# Altium PCB TEMPLATE_PCB_2L.PcbDoc
Units mm, origin at the board's own origin, x right, y up, seen from the top; angles counter-clockwise.
Board outline 60 x 60 mm, 2 copper layers (Top, Bottom), stack 1.54 mm thick; 23 components, 14 nets, 93 pads, 19 vias.
Unrouted connection lines stored in the file: 39.
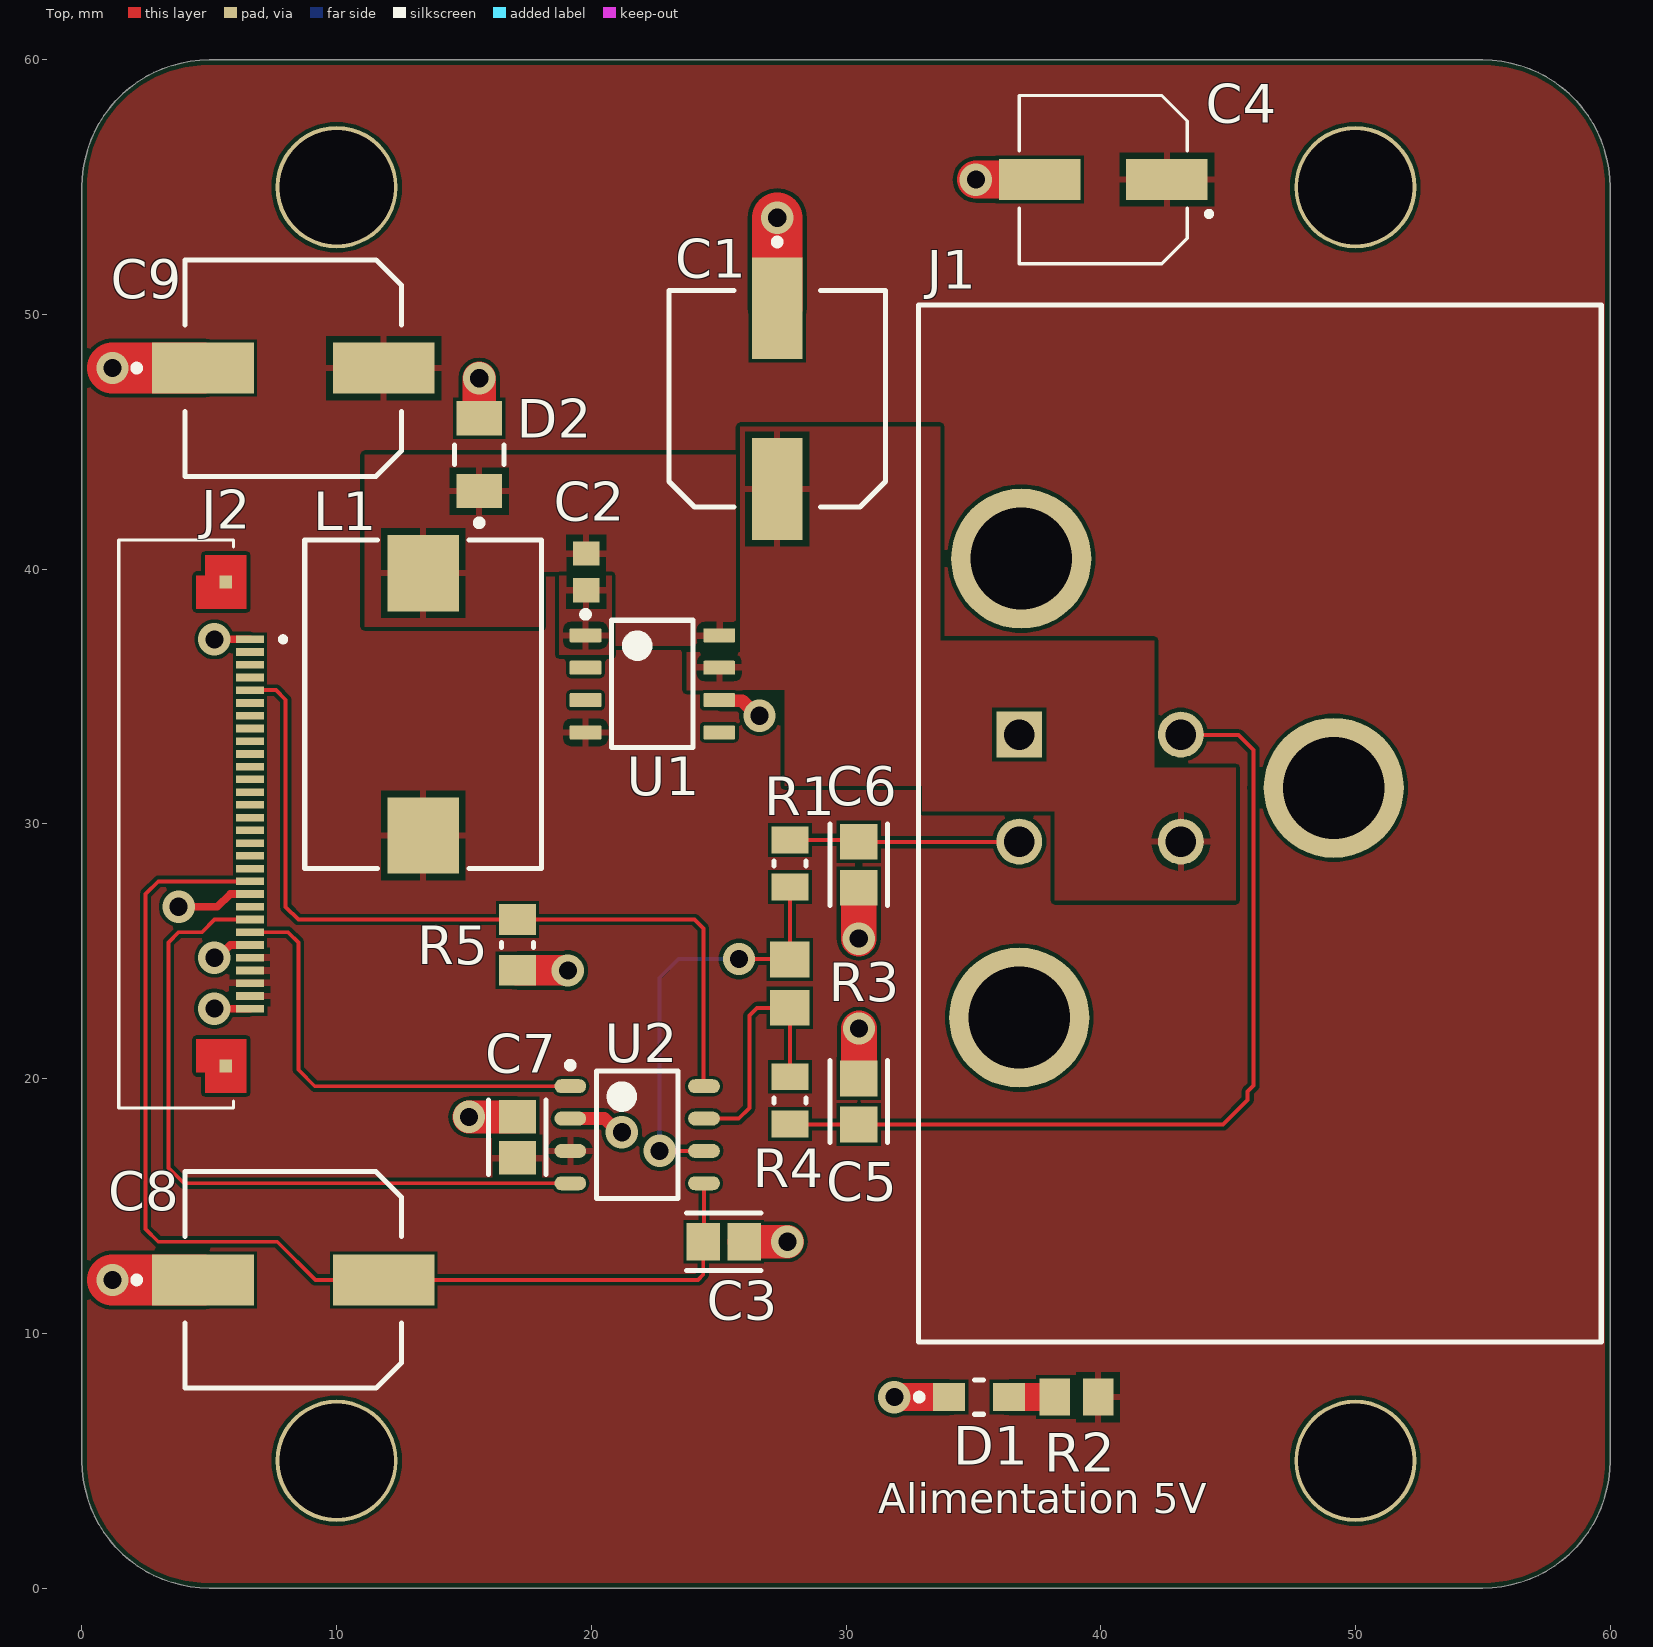
[diagram p0: Top view]
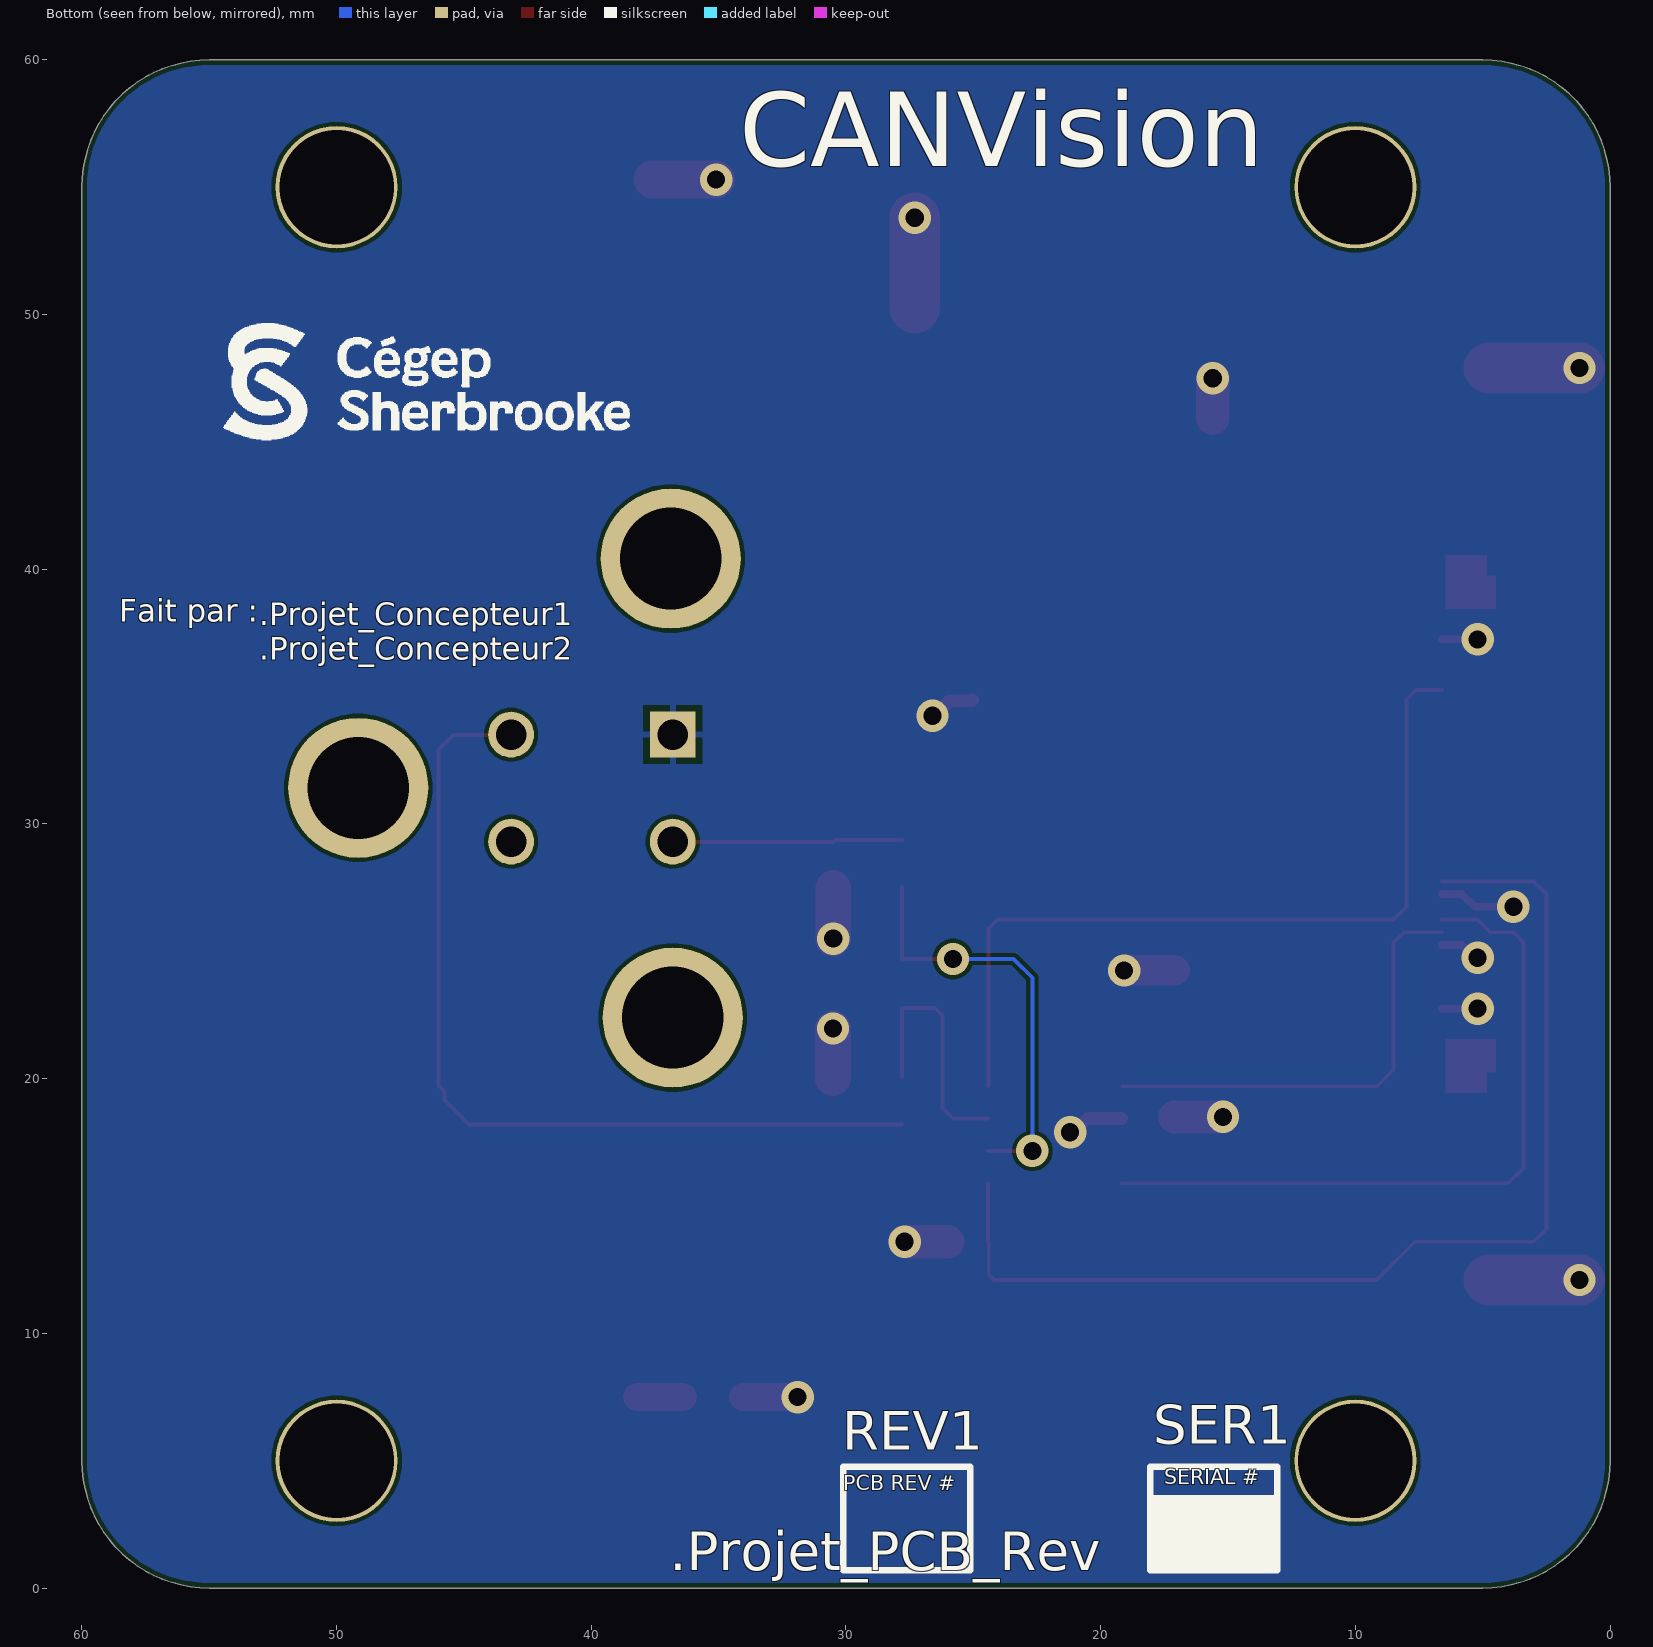
[diagram p1: Bottom view, seen from below]
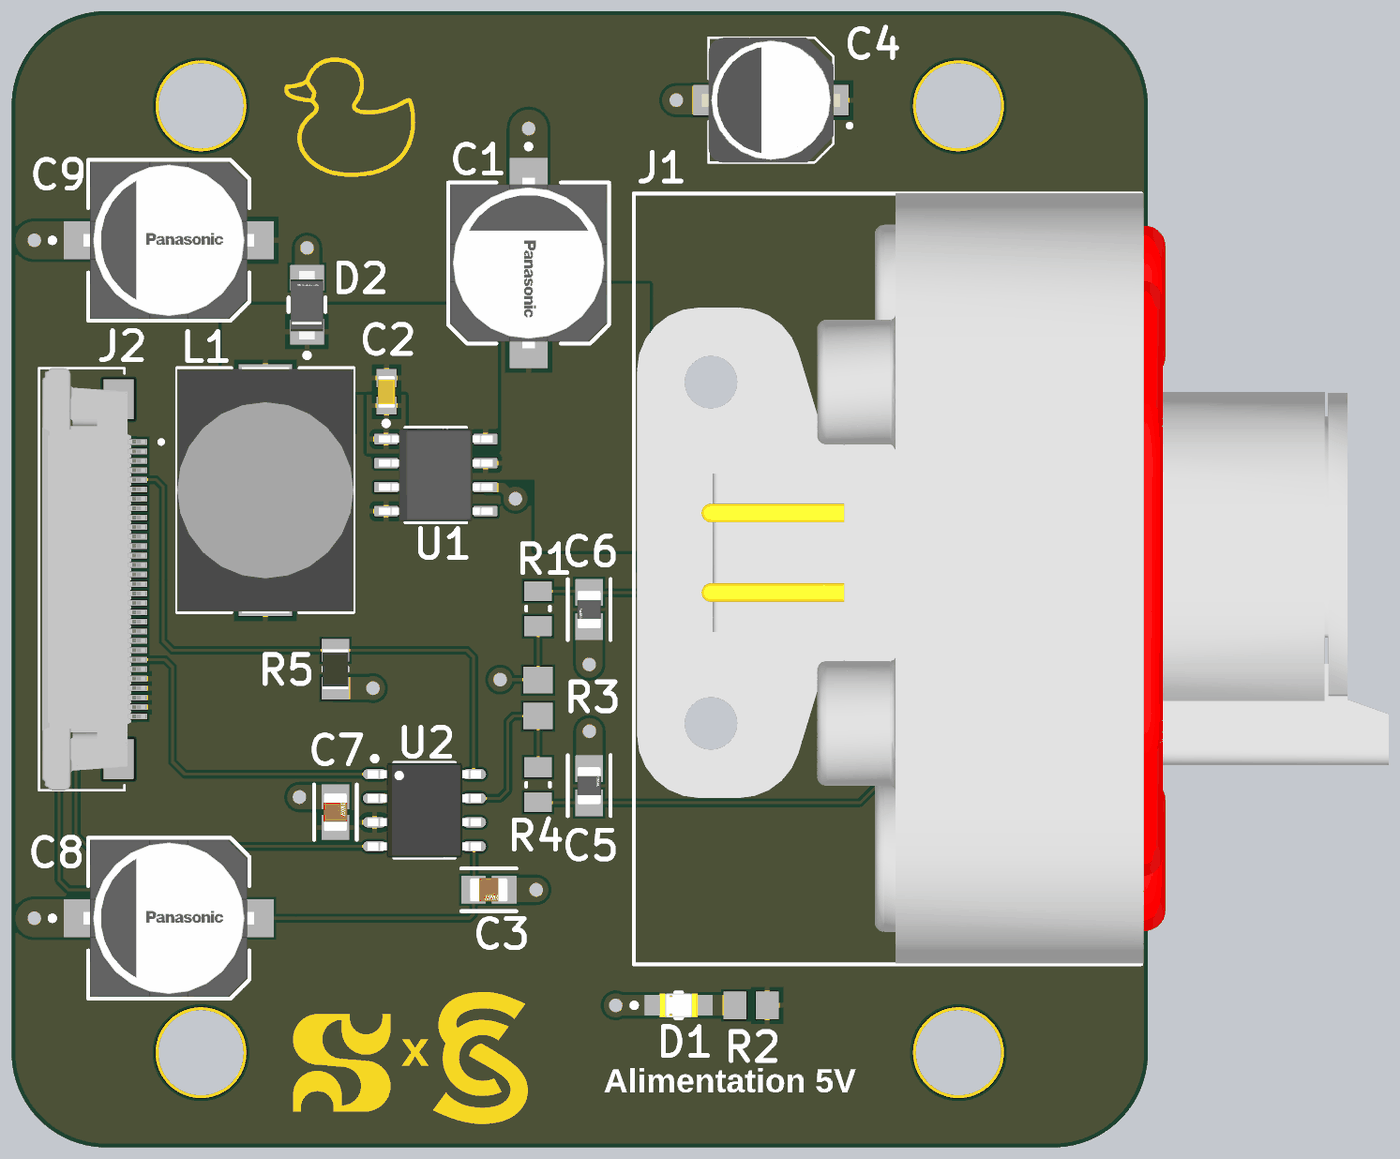
[diagram p2: 3D render of the assembled board from above, using the file's embedded part models]

## Layer stack, top to bottom
Top Solder: solder mask 0.0102, Solder Resist, Dk 3.5
Top: signal copper 0.035
Dielectric 1: core 1.47, FR-4, Dk 4.6
Bottom: signal copper 0.035
Bottom Solder: solder mask 0.0102, Solder Resist, Dk 3.5

## Board outline
0,5 0,55 cw(c5,55) 5,60 55,60 cw(c55,55) 60,55 60,5 cw(c55,5) 55,0 5,0 cw(c5,5)

## Design rules (kind name [scope] priority, off if disabled: settings)
BoardOutlineClearance [All] p1: gap=0.2 ignorepadtopadclearanceinfootprint=FALSE
Clearance [All] p1: gap=0.152 ignorepadtopadclearanceinfootprint=FALSE except(0: Text-Hole; 0.127: Arc-Arc Arc-Track Track-Track SMDPad-Fill SMDPad-Poly SMDPad-Region; 0.2: Arc-SMDPad Arc-Hole Track-SMDPad Track-Hole SMDPad-Hole THPad-Hole Via-Hole Fill-Hole Poly-Hole Region-Hole; 0.254: Arc-Via Track-Via Via-Via; 0.33: Arc-THPad Track-THPad; 0.5: THPad-THPad)
ComponentClearance [All] p1: gap=0.102 collisioncheckmode=3 verticalgap=0.102 showdistances=FALSE
Height [All] p1: minheight=0 maxheight=40 prefheight=12.7
HoleSize [All] p1: absolutevalues=TRUE maxlimit=6.3 minlimit=0.3 maxpercent=80.000 minpercent=20.000
HoleToHoleClearance [All] p1: gap=0.5 allowstackedmicrovias=FALSE
MinimumAnnularRing [All] p1: minimumring=0.13
MinimumSolderMaskSliver [All] p1: minsoldermaskwidth=0.08
PlaneClearance [All] p1: clearance=0.152
PlaneConnect [All] p1: pad.planeconnectstyle=Relief pad.reliefexpansion=0.508 pad.reliefentries=4 pad.reliefconductorwidth=0.254 pad.reliefairgap=0.254 via.planeconnectstyle=Direct via.reliefexpansion=0.508 via.reliefentries=4 via.reliefconductorwidth=0.254 via.reliefairgap=0.254
PolygonConnect [All] p1: thpad.connectstyle=Relief thpad.reliefconductorwidth=0.254 thpad.reliefentries=4 thpad.polygonreliefangle="90 Angle" thpad.airgapwidth=0.254 smdpad.connectstyle=Relief smdpad.reliefconductorwidth=0.254 smdpad.reliefentries=4 smdpad.polygonreliefangle="90 Angle" smdpad.airgapwidth=0.254 via.connectstyle=Direct via.reliefconductorwidth=0.254 via.reliefentries=4 via.polygonreliefangle="90 Angle" via.airgapwidth=0.254
RoutingVias [All] p1: holewidth=0.3 width=0.5 viastyle="Through Hole" minholewidth=0.3 minwidth=0.5 maxholewidth=6.3 maxwidth=6.5
SilkToSilkClearance [All] p1: silktosilkclearance=0.102
SilkToSolderMaskClearance [IsPad] p1: minsilkscreentomaskgap=0.024 clearancetoexposedcopper=FALSE
SolderMaskExpansion SolderMaskExpansion_Via [isVia] p1: expansion=0.102 istentingtop=TRUE
SolderMaskExpansion [All] p2: expansion=0.051 istentingtop=FALSE
Width [All] p1: maxlimit=25.4 minlimit=0.127 preferedwidth=0.152 minimp=50.000000 maximp=50.000000 favimp=50.000000
21 further rules are at their usual default settings.

## Classes and differential pairs
component class TEMPLATE_Title: REV1 SER1

## Components (designator, comment, footprint, x,y, rotation, side; value= is the part's Value field where it differs from the comment)
C1 "100 uF" FP-FKF-MFG 27.3,46.7 r270 top
C2 "10 nF" CAPC1608X90X35ML10T15 19.8,39.9 r90 top
C3 "0.1uF" FP-0805-L_2_01_0_2-W_1_25-IPC_B 25.2,13.6 r0 top
C4 "68 uF" CAP_EEEFN1H680XP 40.1,55.3 r180 top
C5 "100 pF" FP-CC0805-0_1-0_7-IPC_A 30.5,19.102 r90 top
C6 "100 pF" FP-CC0805-0_1-0_7-IPC_A 30.5,28.4 r270 top
C7 "0.1uF" FP-0805-L_2_01_0_2-W_1_25-IPC_B 17.1,17.7 r90 top
C8 "100 uF" FP-FKF-MFG 8.3,12.1 r0 top
C9 "100 uF" FP-FKF-MFG 8.3,47.9 r0 top
D1 "10mA FC / 2.2VF" FP-SML-210-MFG 35.225,7.5 r0 top
D2 "SS14FL" FP-425AD-MFG 15.6,44.5 r90 top value=60pF
J1 "ATM13-4P-BM02" ATM134PBM02 36.8,33.51 r270 top
J2 "F32Q-1A7H1-11030" AMPHENOL_F32Q-1A7H1-11030 3.7,30 r270 top
L1 "47uF" NPI31W470MTRF 13.4,34.7 r270 top
R1 "10" RESC2013X50X30NL20T20 27.8,28.45 r270 top
R2 "270" RESC2013X60X40NL20T25 39.05,7.5 r0 top
R3 "120" RESC2013X60X40ML20T25 27.8,23.73 r90 top
R4 "10" RESC2013X50X30NL20T20 27.8,19.15 r90 top
R5 "1K" RESC2013X60X35ML10T20 17.1,25.25 r90 top
REV1 "Revision Cartridge Mini" REV_REVISION_CARTRIDGE_MINI 30.116,0.699 r180 bottom
SER1 "Serial Cartridge MICRO" SER_SERIAL_CARTRIDGE_MICRO 18.06,0.699 r180 bottom
U1 "LM2675M-5.0/NOPB" D0008A_L 22.4,35.5 r0 top
U2 "TJA1051T/3,118" NXP-SOIC-8_L 21.8,17.8 r0 top

## Footprints (in the part's own frame and the unit in brackets; to place one, negate y for a bottom-side part, rotate by r counter-clockwise, add the part's x,y. Pads: shape width x height; smd on the part's side, far side on the other; paste and mask are expansions set on the pad)
AMPHENOL_F32Q-1A7H1-11030 [mm]
  rect 0.3x1.1 smd mask+0.05: 1(-7.25,2.9) 2(-6.75,2.9) 3(-6.25,2.9) 4(-5.75,2.9) 5(-5.25,2.9) 6(-4.75,2.9) 7(-4.25,2.9) 8(-3.75,2.9) 9(-3.25,2.9) 10(-2.75,2.9) 11(-2.25,2.9) 12(-1.75,2.9) 13(-1.25,2.9) 14(-0.75,2.9) 15(-0.25,2.9) 16(0.25,2.9) 17(0.75,2.9) 18(1.25,2.9) 19(1.75,2.9) 20(2.25,2.9) 21(2.75,2.9) 22(3.25,2.9) 23(3.75,2.9) 24(4.25,2.9) 25(4.75,2.9) 26(5.25,2.9) 27(5.75,2.9) 28(6.25,2.9) 29(6.75,2.9) 30(7.25,2.9)
  rect 0.5x0.5 smd paste-1 mask+0: S1(-9.5,1.95) S2(9.5,1.95)
  Top region: -8.45,0.8 -9.75,0.8 -9.75,1.15 -10.55,1.15 -10.55,2.75 -8.45,2.75
  Top region: 10.55,1.15 9.75,1.15 9.75,0.8 8.45,0.8 8.45,2.75 10.55,2.75
  silkscreen extent -11.15,-2.25 11.15,4.3, body extent -11.16,-2.09 11.14,3.41, height 2.03
ATM134PBM02 [mm]
  rect 1.8x1.8 hole 1.2: 1(0,0)
  round 1.8 hole 1.2: 2(4.2,0) 3(0,6.35) 4(4.2,6.35)
  round 5.5 hole 4: MH1(-6.91,0.08) MH2(11.11,0) MH3(2.09,12.35)
  silkscreen extent -16.86,-3.95 23.84,22.85, body extent -16.87,-3.77 23.79,35.93, height 34.33
CAP_EEEFN1H680XP [mm]
  rect 3.2x1.6 smd: 1(-2.5,0) 2(2.5,0)
  silkscreen extent -4.25,-3.3 3.3,3.3, body extent -3.65,-3.3 3.65,3.3, height 7.7
CAPC1608X90X35ML10T15 [mm] "Chip Capacitor, 2-Leads, Body 1.7x0.9mm, IPC Low Density"
  rect 0.95x1.05 smd: 1(-0.725,0) 2(0.725,0)
  body extent -0.85,-0.45 0.85,0.45, height 0.9
D0008A_L [mm] "SOIC, 8-Leads, Body 5x4mm, Pitch 1.27mm, IPC High Density"
  rrect18% 1.25x0.55 smd: 1(-2.625,1.905) 2(-2.625,0.635) 3(-2.625,-0.635) 4(-2.625,-1.905) 5(2.625,-1.905) 6(2.625,-0.635) 7(2.625,0.635) 8(2.625,1.905)
  silkscreen extent -2.75,-2.5 1.6,2.85, body extent -3,-2.45 3,2.45, height 1.63
FP-425AD-MFG [mm]
  rect 1.34x1.8 smd paste+0 mask+0: 1(-1.43,0) 2(1.43,0)
  silkscreen extent -2.8,-0.97 0.39,0.97, body extent -2.2,-1.07 2.2,1.07, height 0.25
FP-0805-L_2_01_0_2-W_1_25-IPC_B [mm]
  rect 1.305x1.456 smd paste+0 mask+0: 1(-0.806,0) 2(0.806,0)
  silkscreen extent -1.46,-1.13 1.46,1.13, body extent -1.71,-0.98 1.71,0.98, height 0.25
FP-CC0805-0_1-0_7-IPC_A [mm]
  rect 1.408x1.462 smd paste+0 mask+0: 1(-0.902,0) 2(0.902,0)
  silkscreen extent -1.61,-1.13 1.61,1.13, body extent -2.11,-1.23 2.11,1.23, height 0.25
FP-FKF-MFG [mm]
  rect 4x2 smd paste+0 mask+0: 1(-3.55,0) 2(3.55,0)
  silkscreen extent -6.27,-4.25 4.25,4.25, body extent -5.8,-4.5 5.8,4.5, height 0.25
FP-SML-210-MFG [mm]
  rect 1.25x1.1 smd paste+0 mask+0: 1(-1.175,0) 2(1.175,0)
  silkscreen extent -2.47,-0.67 0.18,0.67, body extent -1.9,-0.77 1.9,0.77, height 0.25
NPI31W470MTRF [mm] "Precision Wire Wound Inductor, 2-Leads, Body 12.80x9.30mm, IPC Medium Density"
  rect 3x2.8 smd: 1(-5.15,0) 2(5.15,0)
  silkscreen extent -6.45,-4.65 6.45,4.65, body extent -6.5,-4.65 6.5,4.65, height 5.1
NXP-SOIC-8_L [mm] "SOIC, 8-Leads, Body 5x4mm, Pitch 1.27mm, IPC High Density"
  oval 1.25x0.55 smd: 1(-2.625,1.905) 2(-2.625,0.635) 3(-2.625,-0.635) 4(-2.625,-1.905) 5(2.625,-1.905) 6(2.625,-0.635) 7(2.625,0.635) 8(2.625,1.905)
  silkscreen extent -2.75,-2.5 1.6,2.85, body extent -3,-2.5 3,2.5, height 1.75
RESC2013X50X30NL20T20 [mm] "Chip Resistor, 2-Leads, Body 2.00x1.25mm, IPC Medium Density"
  rect 1.05x1.45 smd: 1(-0.925,0) 2(0.925,0)
  silkscreen extent -0.1,-0.63 0.1,0.63, body extent -1.1,-0.72 1.1,0.72, height 0.5
RESC2013X60X35ML10T20 [mm] "Chip Resistor, 2-Leads, Body 2.1x1.35mm, IPC Low Density"
  rect 1.2x1.45 smd: 1(-1,0) 2(1,0)
  silkscreen extent -0.1,-0.63 0.1,0.63, body extent -1.05,-0.68 1.05,0.67, height 0.6
RESC2013X60X40ML20T25 [mm] "Chip Resistor, 2-Leads, Body 2.00x1.25mm, IPC Low Density"
  rect 1.4x1.55 smd: 1(-0.95,0) 2(0.95,0)
  body extent -1.1,-0.72 1.1,0.72, height 0.6
RESC2013X60X40NL20T25 [mm] "Chip Resistor, 2-Leads, Body 2.00x1.25mm, IPC Medium Density"
  rect 1.2x1.45 smd: 1(-0.85,0) 2(0.85,0)
  body extent -1.1,-0.72 1.1,0.72, height 0.6
REV_REVISION_CARTRIDGE_MINI [mm]
  silkscreen extent 0,0 5,4.08
SER_SERIAL_CARTRIDGE_MICRO [mm]
  silkscreen extent 0,0 5.02,4.08

## Part data
C1 C8 C9: library part CMP-2000-06208-3, "CAP ALUM 100UF 20% 50V SMD", Capacitance=100uF, Case/Package=Radial, Dielectric Material=Aluminium, ESR (Equivalent Series Resistance)=340mR, Leakage Current=3uA, Max Operating Temperature=105°C, Min Operating Temperature=-55°C, Package Quantity=1, Ripple Current=350mA, Tolerance=20%, Voltage=50V, Construction=Cylindrical, Contact Plating=Tin, Diameter=8mm, Height=10.2mm, Height - Seated (Max)=0.402inch, Impedance=340mR, Lead Free="Lead Free", Length=10.2mm, Life (Hours)=2000Hour, Material=Aluminium, Mount="Surface Mount", Number of Pins=2, Packaging="Tape and Reel", Radiation Hardening=No, REACH SVHC="No SVHC", Ripple Current (AC)=350mA, RoHS Compliant=Yes, Series=FK, Termination=SMD/SMT, Voltage Rating=50V, Voltage Rating (DC)=50V, Width=10mm
C2: library part CMP-2100-03642-1, "Chip Capacitor, 10 nF, +/- 10%, 50 V, -55 to 125 degC, 0603 (1608 Metric), RoHS, Tape and Reel", Capacitance=10nF, Case Code (Imperial)=0603, Case Code (Metric)=1608, Dielectric=X7R, Dielectric Material=Ceramic, Insulation Resistance=10GR, Manufacturer=Murata, Max Operating Temperature=125degC, Min Operating Temperature=-55degC, Package Description="2-Pin Surface Mount Device, Body 1.6 x 0.8 mm", Package Quantity=1, Tolerance=10%, Voltage=50V, Case/Package=0603, Datasheet URL=http://search.murata.co.jp/Ceramy/image/img/A01X/G101/ENG/GRM188R71H103KA01-01.pdf, Datasheet Version=42401.0, Depth=0.8mm, Height=0.8mm, Lead Free=LeadFree, Length=1.6mm, Manufacturer URL=http://www.murata.com/, Material=Ceramic, Mount=SurfaceMount, Number of Pins=2, Package Reference=0603, Packaging=TapeandReel, REACH SVHC=Unknown, RoHSCompliant=True, Termination=SMD/SMT, Thickness=0.035inch, Voltage Rating=50V, Voltage Rating (DC)=50V, Width=0.031inch
C3 C7: library part CMP-2007-04172-2, "Automotive Ceramic Capacitor, 0805, 100nF, 10%, X7R, 15%, 100V", Capacitance=100nF, Case Code (Imperial)=0805, Case Code (Metric)=2012, Dielectric=X7R, Dielectric Material=Ceramic, Max Operating Temperature=125°C, Min Operating Temperature=-55°C, Package Quantity=1, Ratings=AEC-Q200, Tolerance=10%, Voltage=100V, Case/Package=0805, Construction=Flat, Depth=1.25mm, Height=1.4mm, Lead Free="Lead Free", Length=2.01mm, Mount="Surface Mount", Number of Pins=2, Packaging="Tape and Reel", Radiation Hardening=No, REACH SVHC="No SVHC", RoHS Compliant=Yes, Series=-, Termination=SMD/SMT, Thickness=0.055inch, Voltage Rating=100V, Voltage Rating (DC)=100V, Width=0.049inch
C4: library part EEEFN1H680XP, Package=None, Availability=Unavailable, MF="{'manufacturer': u'Panasonic Electronic Components'}", MP=EEEFN1H680XP, Price=None
C5 C6: library part CMP-03422-001508-1, "CAP CER 100PF 50V C0G/NPO 0805", Capacitance=100pF, Case Code (Imperial)=0805, Case Code (Metric)=2012, Dielectric=C0G, Dielectric Material=Ceramic, Insulation Resistance=100GR, Max Operating Temperature=125°C, Min Operating Temperature=-55°C, Package Quantity=1, Temperature Coefficient=30ppm/°C, Tolerance=5%, Voltage=50V, Case/Package=0805, Depth=1.25mm, Height=0.6mm, Lead Free="Lead Free", Length=2mm, Mount="Surface Mount", Number of Pins=2, Packaging="Tape and Reel", Radiation Hardening=No, REACH SVHC="No SVHC", Resistor Type=Ceramic, RoHS Compliant=Yes, Series=CC, Termination=SMD/SMT, Thickness=0.024inch, Voltage Rating=50V, Voltage Rating (DC)=50V, Width=1.25mm
D1: library part CMP-08952-000013-1, "LED GREEN CLEAR 0805 SMD", Colour=Green, Forward Current=20mA, Forward Voltage=2.2V, Manufacturer=ROHM, Manufacturer Part Number=SML-210MTT86, Package=SML-210, Power Dissipation=70mW, Reverse Voltage=4V, Temperature="-30°C to +85°C", Temperature Range High=+85°C, Temperature Range Low=-30°C, Automotive=No, Category=Diode, ComponentLink2Description=Datasheet, ComponentLink2URL=https://www.mouser.in/ds/2/348/sml-21-313092.pdf, Device Class L1=Optoelectronics, Device Class L2=LEDs, Device Class L3=unset, Digikey Description="LED GREEN CLEAR 0805 SMD", Height=0.90mm, Ipc Land Pattern Name=DIOCP200125X25, Lead Free=Yes, Led Orientation="Top View", Luminous Intensity=16mcd, Mouser Description="Standard LEDs - SMD GREEN SMD TRANS LENS", Octopart=https://octopart.com/sml-210mtt86-rohm-550711, Peak Emmision Wavelength=573nm, RoHS=TRUE, Wavelength=570nm
D2: library part CMP-07162-000013-1, "DIODE SCHOTTKY 40V 1A SOD123F", Capacitance=60pF, Forward Current=1A, Manufacturer="ON Semiconductor", Max Junction Temp=+125°C, Max Repetitive Reverse Voltage=40V, Max Surge Forward Current=40A, Package=425AD, Peak Reverse Current=30uA, Temperature="-55°C to +125°C", Temperature Range Low=-55°C, Automotive=No, Category=Diode, ComponentLink2Description=Datasheet, ComponentLink2URL=https://www.onsemi.com/pub/Collateral/SS14FL-D.PDF, Device Class L1="Discrete Semiconductors", Device Class L2=Diodes, Device Class L3="Schottky Diodes", Digikey Description="DIODE SCHOTTKY 40V 1A SOD123F", Height=1.08mm, Lead Free=Yes, Manufacturer Part Number=SS14FL, Mouser Description="SS14FL Series 40 V 1 A Surface Mount Schottky Barrier Rectifier - SOD-123F", Octopart=https://octopart.com/ss14fl-on+semiconductor-84331601, Reverse Voltage=40V, RoHS=TRUE, Temperature Range High=+125°C
J2: "Flex Connector, 0.50mm Pitch, Height 2.00mm, Right angle, Slider type, ZIF, Upper contact, 30 position , Without MYLAR", Package=None, Availability="In Stock", Check_prices=https://www.snapeda.com/parts/F32Q-1A7H1-11030/Amphenol/view-part/?ref=eda, MF="Amphenol ICC / Aorora", MP=F32Q-1A7H1-11030, Price=None, Purchase-URL=https://pricing.snapeda.com/search/part/F32Q-1A7H1-11030/?ref=eda, SnapEDA_Link=https://www.snapeda.com/parts/F32Q-1A7H1-11030/Amphenol/view-part/?ref=snap
L1: library part TEMPLATE_Circuit
R1 R4: library part CMP-2001-04915-1, Manufacturer="Vishay Dale", Part Number=CRCW080510R0FKEA
R2: library part CMP-2001-00596-1, Manufacturer=Panasonic, Part Number=ERA6AEB151V
R3: library part CMP-2001-00588-1, Manufacturer=Panasonic, Part Number=ERA6AEB121V
R5: library part CMP-2100-03671-1, "Chip Resistor, 1 KOhm, +/- 1%, 125 mW, -55 to 155 degC, 0805 (2012 Metric), RoHS, Tape and Reel", Case Code (Imperial)=0805, Case Code (Metric)=2012, Manufacturer=Yageo, Max Operating Temperature=155degC, Max Power Dissipation=125mW, Min Operating Temperature=-55degC, Package Description="2-Pin Surface Mounted Device, Body 2 x 1.25 mm", Package Quantity=1, Resistance=1KOhm, Temperature Coefficient=100ppm/degreesC, Tolerance=1%, Voltage Rating=150V, Case/Package=0805, Composition=ThickFilm, Datasheet URL=http://www.yageo.com/NewPortal/yageodocoutput?fileName=/pdf/R-Chip/PYu-RC_Group_51_RoHS_L_5.pdf, Datasheet Version="Rev. 5, 10/2016", Depth=1.25mm, Height=0.024inch, Lead Free=LeadFree, Length=0.079inch, Manufacturer URL=http://www.yageo.com/, Military Standard=Not, Number of Pins=2, Number of Terminations=2, Package Reference=0805, Packaging=TapeandReel, Power Rating=125mW, REACH SVHC=Unknown, RoHSCompliant=true, Termination=SMD/SMT, Voltage Rating (DC)=150V, Width=0.049inch
REV1: library part CMP-008-000037-1, "REV - REVISION CARTRIDGE MINI", Assembly Type=NONE, COLLISIONCHECKMODE=3, Component Type="Standard (No BOM)", Design Item ID=REV_REVISION_CARTRIDGE_MINI, GAP=0mil, LAYERKIND=SameLayer, NETSCOPE=AnyNet, Pin Count=0, Rule=UNIONINDEX=0, RULEKIND=ComponentClearance, SHOWDISTANCES=FALSE, Source=CEGEP_SHERBROOKE_TGE_LIBRARY.SchLib, UNIT=Imperial, VERTICALGAP=0mil
SER1: library part CMP-008-000042-1, "SER - SERIAL CARTRIDGE MICRO", Assembly Type=NONE, COLLISIONCHECKMODE=3, Component Type="Standard (No BOM)", Design Item ID=SER_SERIAL_CARTRIDGE_MICRO, GAP=0mil, LAYERKIND=SameLayer, NETSCOPE=AnyNet, Pin Count=0, Rule=UNIONINDEX=0, RULEKIND=ComponentClearance, SHOWDISTANCES=FALSE, Source=CEGEP_SHERBROOKE_TGE_LIBRARY.SchLib, UNIT=Imperial, VERTICALGAP=0mil
U1: library part CMP-0069-00699-3, "SIMPLE SWITCHER® Power Converter High Efficiency 1A Step-Down Voltage Regulator, 8-pin Narrow SOIC, Pb-Free", Manufacturer="Texas Instruments", PackageTopMarking=NSZXTT*2675*M5.0, PowerWise=N, Code_IPC=SOIC127P600-8, Code_JEDEC=MS-012-AA, ComponentLink1Description="Datasheet URL", ComponentLink1URL=http://www.ti.com/general/docs/lit/getliterature.tsp?genericPartNumber=LM2675&fileType=pdf, CompType=Switcher, PackageDescription="SOIC Narrow, 4.9 x 3.9 x 1.45mm, 8 Lead, 1.27mm Pitch", PackageReference=D0008A, PinCount=8, RoHS=Y
U2: library part CMP-2000-07245-1, "High-Speed CAN Transceiver, 3 to 5 V, 8-Pin SOIC (SOT96-1), RoHS, Tape and Reel", Manufacturer=NXP, Operating Supply Voltage (Max)=5.5V, Operating Supply Voltage (Min)=4.5V, Operating Supply Voltage (Typ)=5V, Operating Temperature (Max)=125C, Operating Temperature (Min)=-40C, Operating Temperature Classification=Automotive, Package Description="8-Pin Small Outline Integrated Circuit, Body 4.9 x 3.9 mm, Pitch 1.27 mm", Package Reference=SOT96-1, Package Type=SO, Power Down Mode=Normal/Silent, Supply Current=70mA, Category=Transceiver, Data Rate=1Mbps, Datasheet URL=http://www.nxp.com/documents/data_sheet/TJA1051.pdf, Datasheet Version="Rev. 7, 01/2015", DELETED=Compliant, Manufacturer URL=http://www.nxp.com/, Mounting=SurfaceMount, Mounting Technology=SurfaceMount, Number of Transceivers=1, Packaging=TapeandReel, Pin Count=8, Rad Hardened=No, Standard Supported=ISO11898-2

## Free pads (board coordinates)
  round 4.8 hole 4.5 unplated: ""(10,5) ""(10,55) ""(50,5) ""(50,55)

## Via types
v1: diameter 1.27, hole 0.711, Top to Bottom, tented both sides, 19 vias

## Nets (pads, with @x,y where several pads share a name; then routed paths per layer and width w, separated by ;. In a path a pad name is that pad's centre, name@x,y a point inside that pad or via, vN(x,y) a via of type N, cw(c..) or ccw(c..) an arc to the next point about the centre after c; other vN are vias at no path point)
3v3: C3.1 C8.2 J2.20 U2.5 | length 43.9
  Top w0.152: J2.20 3,27.75 2.5,27.25 2.5,14.1 3,13.6 7.672,13.6 9.172,12.1 C8.2 24.184,12.1 24.394,12.31 C3.1 24.425,13.631 U2.5
+5: C4.1 C7.1 C9.2 J2.26 J2.27 J2.28 J2.29 L1.2 R2.2 U1.4 U2.3
+12: C1.2 J1.4 U1.7
Enable: J2.5 R5.2 U2.8 | length 32.6
  Top w0.152: J2.5@6.606,35.256 7.622,35.256 8,34.879 8,26.748 8.498,26.25 R5.2 24.05,26.25 24.4,25.9 24.4,19.73 U2.8
GND: C1.1 C3.2 C4.2 C5.2 C6.2 C7.2 C8.1 C9.1 D1.1 D2.2 J1.1 J2.1 J2.21 J2.25 J2.30 R5.1 U1.6 U2.2 | length 37.9
  Top w0.152: C7.2@17.094,18.5 C7.2 ; C5.2 C5.2@30.511,20.015
  Top w0.3: v1(3.8,26.75) 5.321,26.75 5.821,27.25 J2.21 ; v1(5.2,22.75) J2.30 ; v1(5.2,24.75) 5.321,24.75 5.821,25.25 J2.25 ; v1(5.2,37.25) J2.1
  Top w0.5: U2.2 20.514,18.435 21.049,17.9 v1(21.2,17.9) ; U1.6 25.05,34.84 25.926,34.84 26.516,34.25 v1(26.604,34.25)
  Top w1.1: v1(31.9,7.5) D1.1
  Top w1.2: R5.1 v1(19.081,24.25)
  Top w1.3: v1(15.2,18.5) C7.2@17.094,18.5 ; D2.2 v1(15.6,47.5) ; C3.2 v1(27.7,13.6)
  Top w1.4: v1(30.5,25.5) C6.2 ; C5.2@30.511,20.015 v1(30.511,21.972)
  Top w1.5: v1(35.1,55.3) C4.2
  Top w2: v1(1.2,12.1) C8.1 ; v1(1.2,47.9) C9.1 ; C1.1 v1(27.3,53.8)
NetC2_1: C2.1 U1.1
NetC2_2: C2.2 D2.1 L1.1 U1.8
NetC5_1: C5.1 J1.3 R4.1 | length 35.2
  Top w0.152: R4.1 27.825,18.2 C5.1 44.8,18.2 45.767,19.167 45.767,19.497 46,19.73 46,31.218 45.998,31.261 cw(c49.15,31.42) 45.998,31.579 46,31.622 46,32.9 45.41,33.49 J1.3@43.3,33.49
NetC6_1: C6.1 J1.2 R1.1 | length 9.2
  Top w0.152: R1.1 30.427,29.375 C6.1 30.512,29.29 J1.2@36.95,29.29
NetD1_2: D1.2 R2.1 | length 1.8
  Top w1.1: D1.2 R2.1
NetR1_2: R1.2 R3.2 U2.6 | length 16.8
  Top w0.152: v1(22.685,17.168) 22.686,17.166 U2.6 U2.6 ; v1(25.8,24.7) 27.78,24.7 R3.2 R1.2
  Bottom w0.152: v1(22.685,17.168) 22.685,23.965 23.42,24.7 v1(25.8,24.7)
NetR3_1: R3.1 R4.2 U2.7 | length 10
  Top w0.152: U2.7 25.79,18.435 26.205,18.85 26.205,22.485 26.5,22.78 R3.1 R4.2
U0RXD: J2.23 U2.4 | length 28.4
  Top w0.152: J2.23 5.213,26.25 4.713,25.75 3.8,25.75 3.4,25.35 3.4,16.5 4.005,15.895 U2.4
U0TXD: J2.24 U2.1 | length 18
  Top w0.152: J2.24 8.098,25.75 8.498,25.35 8.498,20.352 9.145,19.705 U2.1
pads on no net: J1.MH1 J1.MH2 J1.MH3 J2.2 J2.3 J2.4 J2.6 J2.7 J2.8 J2.9 J2.10 J2.11 J2.12 J2.13 J2.14 J2.15 J2.16 J2.17 J2.18 J2.19 J2.22 J2.S1 J2.S2 U1.2 U1.3 U1.5

## Polygon pours and split planes (outlines as drawn)
+5 on Top "NONET_L-01_P-001" (solid, pour order 4): 0,5 0,55 cw(c5,55) 5,60 55,60 cw(c55,55) 60,55 60,5 cw(c55,5) 55,0 5,0 cw(c5,5)
+12 on Top "NONET_L-01_P-001" (solid, pour order 0): 23.742,36.75 25.843,36.75 25.843,45.6 33.7,45.6 33.7,40.4 33.7,37.2 42.1,37.2 42.1,32.2 45.3,32.2 45.3,28.5 45.3,27 38.2,27 38.2,30.506 33,30.506 33,31.5 27.6,31.5 27.6,35.25 23.742,35.25
NetC2_2 on Top "NONET_L-01_P-001" (solid, pour order 3): 20.85,37 25.75,37 25.754,37.004 25.754,44.5 20.85,44.5
NetC2_2 on Top "NONET_L-01_P-001" (solid, pour order 2): 11.1,37.749 11.1,44.5 25.6,44.5 25.6,39.9 18.05,39.9 18.05,37.749
NetC2_1 on Top "NONET_L-01_P-001" (solid, pour order 1): 20.8,39.75 18.75,39.75 18.75,36.65 20.8,36.65
GND on Bottom "NONET_L-01_P-001" (solid, pour order 5): 0,5 0,55 cw(c5,55) 5,60 55,60 cw(c55,55) 60,55 60,5 cw(c55,5) 55,0 5,0 cw(c5,5)

## Silkscreen, mask and mechanical layers (free items; w line width, h text height)
Top Overlay:
  text "Alimentation 5V" at 31.267,2.541 h2
Bottom Overlay:
  drawing of 18 lines, arcs and shapes, not listed
  text "CANVision" at 34.188,54.869 h5
  text "Fait par :" at 58.525,37.648 h1.52
  text ".Projet_Concepteur1" at 53.031,37.512 h1.52
  text ".Projet_Concepteur2" at 53.041,36.162 h1.52
Top Solder:
  drawing of 4 lines, arcs and shapes, not listed
  text "x" at 20.578,3.752 h3
Board Outline:
  the board outline again, w0.254

## Dimensions
59.65,50.37 to 55,60 on Measure
59.65,9.67 to 55,0 on Measure
10,55 to 0,55 on Measure
10,55 to 5,60 on Measure
50,55 to 55,60 on Measure
50,55 to 60,55 on Measure
50,5 to 55,0 on Measure
10,5 to 5,0 on Measure
10,5 to 0,5 on Measure
50,5 to 60,5 on Measure
5,0 to 5,60 on Measure
0,5 to 60,5 on Measure

## Text inside footprints (layer, text, board x,y; h text height)
REV1: Bottom Overlay "PCB REV #" at 30.116,3.649 h1
SER1: Bottom Overlay "SERIAL #" at 17.497,3.891 h1